# Altium PCB PCB_Control_2021-08-04.pcbdoc (part 2 of 2)
Units mil, origin at the board's own origin, x right, y up, seen from the top; angles counter-clockwise.
Board outline 4897.2 x 3916.1 mil, 2 copper layers (Top Layer, Bottom Layer); 50 components, 74 nets, 337 pads, 66 vias.
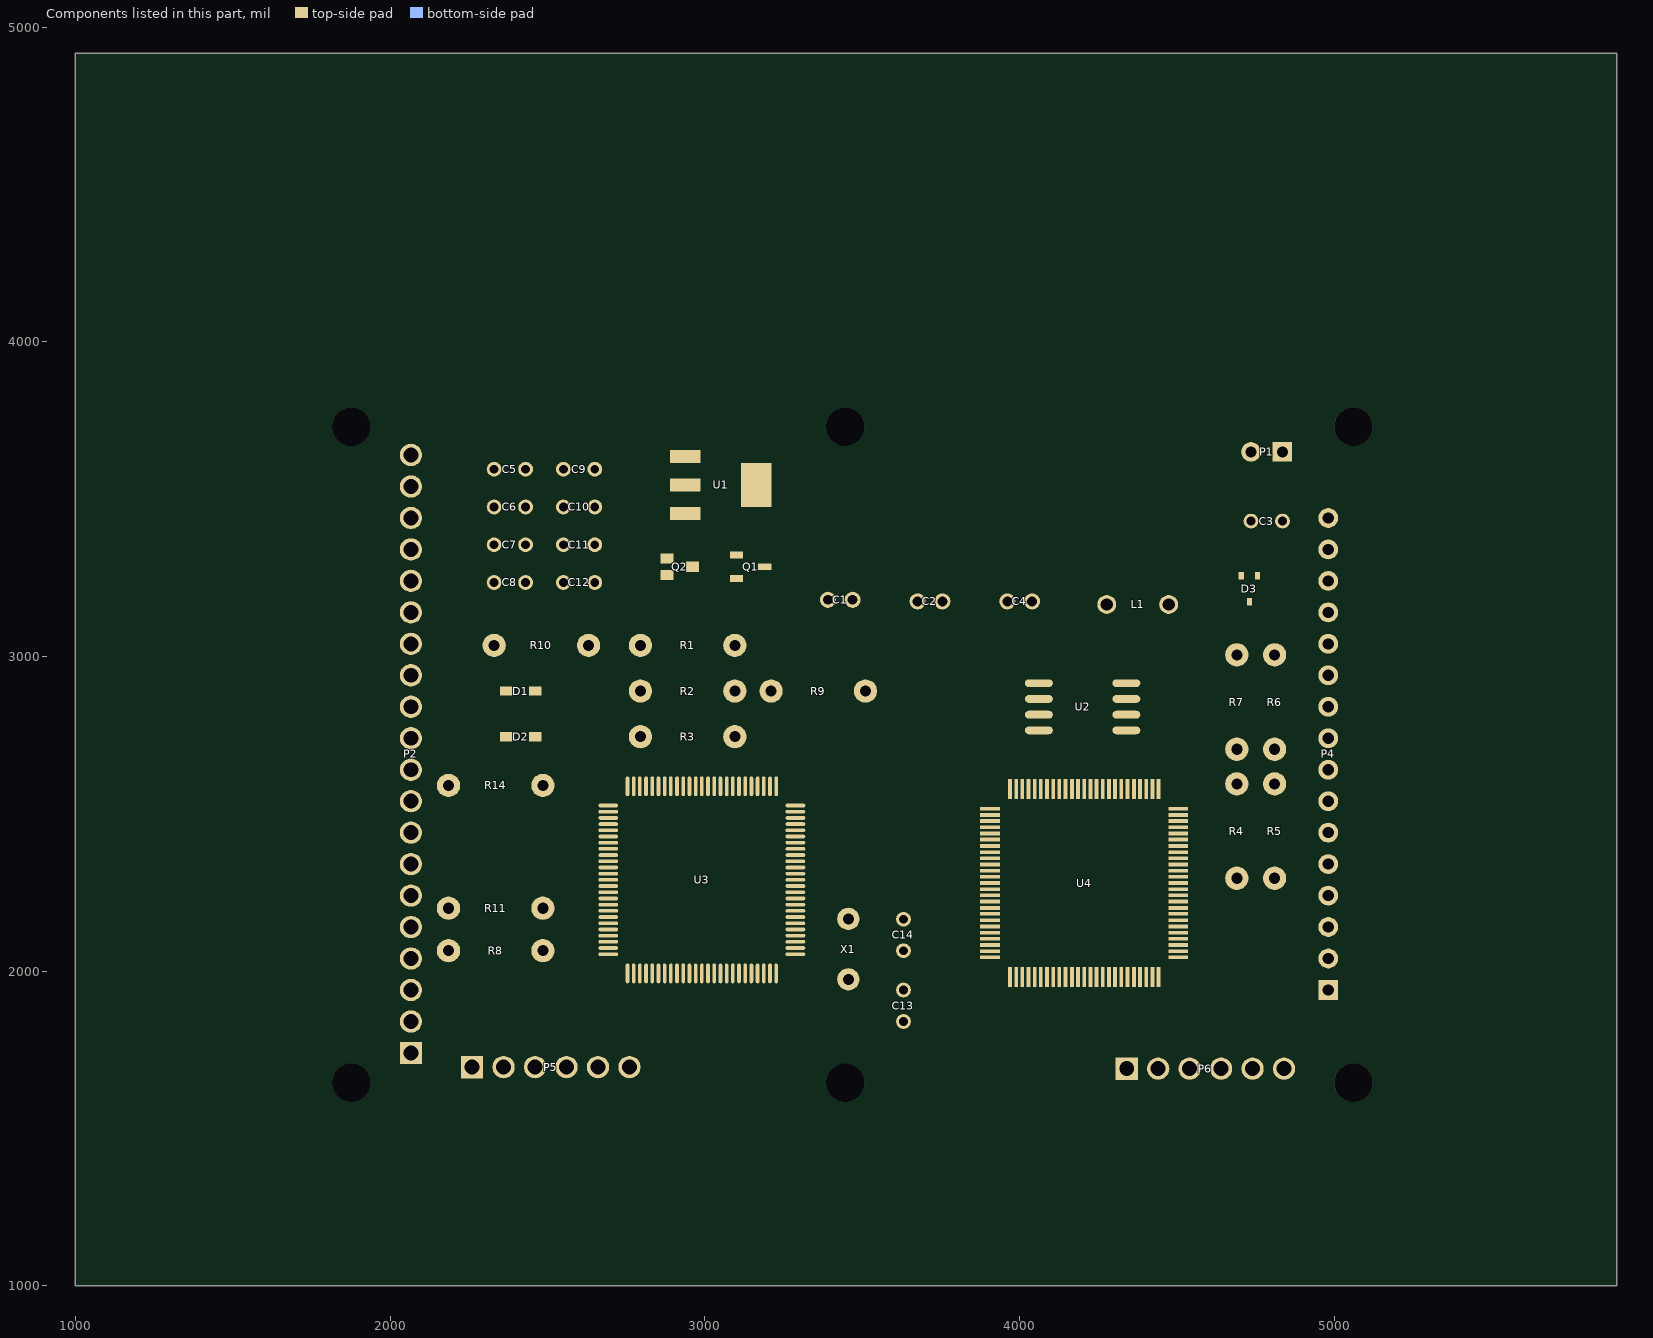
[diagram p2: the components of this part, seen from the top]

## Via types
v1: diameter 24.02, hole 12.01, Top Layer to Bottom Layer, 66 vias

## Nets (pads, with @x,y where several pads share a name; then routed paths per layer and width w, separated by ;. In a path a pad name is that pad's centre, name@x,y a point inside that pad or via, vN(x,y) a via of type N, cw(c..) or ccw(c..) an arc to the next point about the centre after c; other vN are vias at no path point) (continued)
pads on no net: D3.2 U1.4 U3.1 U3.2 U3.3 U3.4 U3.5 U3.7 U3.9 U3.14 U3.18 U3.24 U3.25 U3.26 U3.29 U3.30 U3.57 U3.65 U3.66 U3.67 U3.76 U3.77 U3.78 U3.79 U3.80 U3.81 U3.82 U3.85 U3.88 U3.89 U3.90 U3.91 U3.92 U3.93 U3.94 U3.95 U3.100 U4.12 U4.22 U4.23 U4.27 U4.34 U4.35 U4.36 U4.37 U4.38 U4.39 U4.41 U4.42 U4.43 U4.44 U4.47 U4.48 U4.49 U4.50 U4.53 U4.54 U4.55 U4.56 U4.58 U4.59 U4.60 U4.61 U4.62 U4.64 U4.65 U4.66 U4.67 U4.69 U4.70 U4.71 U4.72 U4.73 U4.77 U4.78 U4.79 U4.87 U4.88 U4.91 U4.97

## Polygon pours and split planes (outlines as drawn)
GND on Bottom Layer (solid): 1776.1,3830 5161.1,3830 5161.1,1545 1576.1,1500
GND on Top Layer (solid): 1776.1,3830 5161.1,3830 5161.1,1545 1776.1,1545 1651.1,1645

## Other copper
Top Layer:
  region net U2_7: 4496.41,3145.14 4451.41,3145.17 4468.9,3124.16 4478.9,3124.15
  region net U2_1: 4275.2,3194.94 4307.02,3163.12 4309.5,3190.34 4302.43,3197.42
  region net U2_1: 4247.14,3166.87 4278.97,3135.06 4251.75,3132.58 4244.67,3139.64
  region net Q1_3: 3444.33,3178.41 3471.49,3205.54 3448.79,3208.18 3441.71,3201.12
  region net U2_3: 4853.12,3414.46 4817.88,3414.46 4830.5,3398.01 4840.5,3398.01
  region net VCC: 2429.03,3378.45 2453.95,3353.53 2456.66,3374.09 2449.59,3381.16
  region net VCC: 2649.09,3451.54 2673.95,3476.53 2674.63,3458.04 2667.57,3450.96
  region net VCC: 2627.05,3476.47 2651.97,3451.55 2631.41,3448.84 2624.34,3455.91
  region net X1: 3615.56,1922.38 3615.56,1957.62 3599.11,1945 3599.11,1935
  region net X2: 3618.22,2145.34 3613.21,2180.23 3598.71,2165.45 3600.15,2155.45
  region net P1_2: 4715,3626.75 4715,3673.25 4693.3,3655 4693.3,3645
  region net U3_6: 4979.13,2108.57 5012.53,2141.97 5014.96,2113.21 5007.89,2106.14
  region net U4_93: 4949.67,2738.03 4983.07,2771.43 4954.32,2773.86 4947.24,2766.79
  region net U4_86: 4949.67,2941.97 4983.07,2908.57 4954.32,2906.14 4947.24,2913.22
  region net U3_53: 2458.28,1659.64 2495.86,1697.22 2498.15,1664.42 2491.08,1657.35
  region net VCC: 2325.14,1692.78 2362.72,1730.36 2329.92,1732.65 2322.85,1725.58
  region net U4_52: 4805.14,1687.78 4842.72,1725.36 4809.93,1727.65 4802.85,1720.58
  region net P1_2: 3058.57,3032.68 3097.82,3071.93 3072.23,3065.34 3065.16,3058.27
  region net Q1_1: 2758.57,3037.32 2797.82,2998.07 2763.42,2995.85 2756.35,3002.92
  region net Q1_1: 2823.25,3059.47 2767.75,3059.47 2790.5,3085.37 2800.5,3085.37
  region net U3_8: 2819.97,2862.25 2819.97,2917.75 2845.87,2895 2845.87,2885
  region net U3_8: 3058.57,2742.68 3097.82,2781.93 3063.42,2784.15 3056.35,2777.08
  region net R6_1: 4838.25,3029.47 4782.75,3029.47 4805.5,3055.37 4815.5,3055.37
  region net U2_5: 4773.57,2702.68 4812.82,2741.93 4778.42,2744.15 4771.35,2737.08
  region net U2_8: 4653.57,3007.32 4692.82,2968.07 4658.42,2965.85 4651.35,2972.92
  region net U3_17: 2183.18,2028.07 2222.43,2067.32 2224.65,2032.92 2217.58,2025.85
  region net U4_100: 3508.18,2853.07 3547.43,2892.32 3549.65,2857.92 3542.58,2850.85
  region net U3_49: 2606.03,3007.25 2606.03,3062.75 2580.13,3040 2580.13,3030
  region net U3_49: 2628.18,3071.93 2667.43,3032.68 2669.65,3067.08 2662.58,3074.15
  region net X1: 3420.74,1976.18 3458.3,1938.58 3425.5,1936.31 3418.43,1943.39
  region net X1: 3453.88,1938.58 3491.46,1976.16 3493.58,1943.54 3486.51,1936.46
  region net X2: 3482.47,2189.73 3476.29,2136.94 3503.43,2155.45 3504.6,2165.45
  region net U3_73: 2089.54,3413.43 2089.54,3466.57 2114.34,3445 2114.34,3435
  region net U3_70: 2030.74,3342.22 2068.32,3304.64 2035.53,3302.35 2028.45,3309.42
  region net U3_69: 2089.54,3213.43 2089.54,3266.57 2114.34,3245 2114.34,3235
  region net D1_1: 2089.54,3113.43 2089.54,3166.57 2114.34,3145 2114.34,3135
  region net U3_62: 2063.88,2704.64 2101.46,2742.22 2103.75,2709.42 2096.68,2702.35
  region net U3_61: 2030.74,2637.78 2068.32,2675.36 2035.53,2677.65 2028.45,2670.58
  region net U3_60: 2063.88,2575.36 2101.46,2537.78 2103.75,2570.58 2096.68,2577.65
  region net U3_58: 2099.92,2229.42 2072.37,2274.87 2104.33,2270 2110.39,2260
  region net U3_56: 2089.54,2113.43 2089.54,2166.57 2114.34,2145 2114.34,2135
  region net U3_50: 2089.54,1813.43 2089.54,1866.57 2114.34,1845 2114.34,1835
  region net Q1_3: 3948.39,2723.47 3945.77,2741.29 3954.66,2738.6 3956.13,2728.6
  region net VCC: 3985.7,2701.47 3985.7,2719.49 3991.5,2715.48 3991.5,2705.48
  region net VCC: 3204.24,2166.32 3204.24,2184.34 3212.65,2180.33 3212.65,2170.33
  region net VCC: 3020.23,1900.57 3020.19,1918.59 3028.6,1914.6 3028.63,1904.6
  region net VCC: 2947.33,1903.22 2934.61,1890.47 2931.49,1899.24 2938.55,1906.32
  region net VCC: 4283.75,2019.26 4275.71,2035.38 4269.71,2028.57 4274.71,2018.57
  region net VCC: 4297.97,2035.38 4289.92,2019.26 4298.97,2018.57 4303.96,2028.57
  region net X2: 3298.65,1944.66 3290.52,1960.73 3284.55,1953.9 3289.61,1943.9
  region net P1_2: 3554.55,3640.99 3554.55,3659.01 3562.96,3655 3562.96,3645
  region net U3_75: 2563.24,2621.23 2563.19,2603.22 2571.61,2607.2 2571.63,2617.2
  region net U3_74: 2431.35,2630.49 2431.34,2648.5 2439.75,2644.5 2439.75,2634.5
  region net U3_73: 2992.79,2822.21 2980.05,2809.48 2976.94,2818.26 2984.02,2825.33
  region net U3_73: 2800.74,2542.94 2783.09,2546.56 2788.6,2554.01 2798.6,2551.96
  region net U3_69: 2218.44,3241.64 2205.71,3228.9 2203.81,3236.46 2210.88,3243.54
  region net U3_69: 3133.06,2473.79 3120.38,2486.58 3118.88,2479.45 3125.92,2472.35
  region net U3_64: 2905.84,2715.42 2893.11,2728.15 2901.88,2731.26 2908.96,2724.19
  region net U3_64: 3001.1,2743.42 2988.36,2730.69 2985.25,2739.46 2992.32,2746.54
  region net U3_64: 2735.98,2474.15 2753.99,2474.15 2749.98,2465.74 2739.98,2465.74
  region net U3_64: 2773.17,2438.97 2760.43,2426.24 2757.32,2435.02 2764.4,2442.09
  region net U3_64: 2978.18,2527.86 2960.45,2531.02 2965.8,2538.61 2975.8,2536.82
  region net U3_63: 2887.51,2675.23 2887.45,2657.22 2895.87,2661.2 2895.9,2671.2
  region net U3_62: 2255.99,2492.19 2243.26,2479.46 2240.15,2488.23 2247.22,2495.31
  region net U3_62: 3009.58,2506.86 2991.57,2506.9 2995.6,2515.3 3005.6,2515.28
  region net U3_60: 2812.2,2470.87 2797.42,2460.58 2795.83,2469.72 2804.17,2475.53
  region net U3_60: 3045.12,2536.54 3032.41,2549.3 3041.19,2552.39 3048.25,2545.31
  region net U3_59: 2954.98,2729.92 2954.94,2711.91 2963.36,2715.9 2963.38,2725.9
  region net U3_58: 2373.41,2295.4 2360.67,2308.13 2357.56,2299.35 2364.64,2292.28
  region net U3_58: 3097.92,2628.85 3079.91,2628.88 3083.9,2620.47 3093.9,2620.45
  region net U3_56: 2365.44,2225.95 2352.7,2238.68 2349.59,2229.91 2356.67,2222.83
  region net U3_56: 3114.39,2521.15 3101.65,2533.87 3110.42,2536.99 3117.5,2529.93
  region net U3_52: 3167.42,2685.82 3154.68,2673.09 3163.46,2669.98 3170.53,2677.05
  region net U3_51: 3226.97,2479.42 3214.22,2492.14 3222.99,2495.26 3230.07,2488.2
  region net U3_50: 3205.1,2773.73 3192.36,2761 3201.13,2757.88 3208.21,2764.95
  region net U3_50: 2686.24,1835.11 2673.51,1822.38 2670.39,1831.15 2677.47,1838.23
  region net U3_27: 3440.05,2065.7 3440.04,2047.69 3431.64,2051.7 3431.65,2061.7
  region net U3_27: 4181,2633.55 4172.11,2617.89 4181.03,2616.57 4186.71,2626.57
  region net U4_99: 4409.79,2476.9 4409.78,2458.89 4401.38,2462.9 4401.39,2472.9
  region net U4_98: 4430.42,2482.06 4430.42,2500.08 4422.01,2496.07 4422.01,2486.07
  region net U4_94: 4097.52,2630.11 4079.66,2632.44 4082.5,2623.59 4092.5,2622.29
  region net U4_92: 4643.11,2755.32 4630.37,2742.59 4627.26,2751.37 4634.33,2758.44
  region net U4_86: 4510.21,2726.39 4510.21,2744.41 4501.8,2740.4 4501.8,2730.4
  region net U4_86: 4526.37,2805.65 4526.37,2823.67 4534.78,2819.66 4534.78,2809.66
  region net U4_85: 4569.62,2703.3 4569.61,2721.31 4561.21,2717.3 4561.22,2707.3
  region net U4_84: 4551.29,2700.63 4543.39,2684.44 4537.35,2691.22 4542.23,2701.22
  region net U4_81: 4895.03,2739.74 4913.05,2739.74 4909.04,2731.33 4899.04,2731.33
  region net U4_80: 4496.2,2645.06 4483.47,2657.79 4480.36,2649.02 4487.43,2641.95
  region net U3_53: 2728.16,1580.99 2728.16,1599.01 2719.75,1595 2719.75,1585
  region net U3_53: 3201.1,2542.61 3188.35,2529.89 3185.25,2538.67 3192.33,2545.73
  region net U4_2: 4341.81,2190.32 4329.08,2177.59 4325.97,2186.36 4333.04,2193.44
  region net U4_74: 4771.07,2455.81 4758.36,2443.05 4755.23,2451.82 4762.29,2458.9
  region net U4_24: 4037.65,2056.52 4032.92,2073.9 4025.82,2068 4028.54,2058
  region net U3_8: 2901.1,1950.06 2883.09,1950.08 2887.1,1958.48 2897.1,1958.47
  region net U3_87: 3172.76,2098.91 3160.06,2086.14 3156.92,2094.91 3163.98,2102
  region net U3_87: 3717.23,1844.73 3717.19,1826.71 3725.61,1830.7 3725.63,1840.7
  region net U3_34: 3559.58,2174.51 3559.54,2192.52 3551.14,2188.5 3551.16,2178.5
  region net U3_34: 3810.21,2152.45 3809,2170.42 3817.66,2167 3818.33,2157
  region net U3_98: 2447.25,2317.23 2437.33,2302.2 2446.49,2300.82 2452.12,2309.34
  region net U3_99: 2654.84,2083.24 2653.18,2065.3 2661.92,2068.5 2662.84,2078.5
  region net U3_99: 2688.16,1930.99 2688.16,1949.01 2679.75,1945 2679.75,1935
  region net U3_99: 2629.04,1930.99 2629.04,1949.01 2637.45,1945 2637.45,1935
  region net Q1_1: 2481.35,2902.5 2481.35,2877.5 2496.35,2885 2496.35,2895
  region net D1_1: 2381.8,2875.24 2356.8,2875.24 2364.3,2860.24 2374.3,2860.24
  region net D1_1: 2356.8,2904.76 2381.8,2904.76 2374.3,2915.8 2364.3,2915.8
  region net U3_68: 2474.2,2730.24 2449.2,2730.24 2456.7,2719.2 2466.7,2719.2
  region net D1_1: 2356.8,2759.76 2381.8,2759.76 2374.3,2774.76 2364.3,2774.76
  region net R6_1: 4738.75,3186.25 4738.75,3161.75 4749.8,3169 4749.8,3179
  region net U2_1: 4748.25,3243.75 4748.25,3268.25 4737.2,3261 4737.2,3251
  region net Q1_1: 3079.76,3332.87 3079.76,3311.93 3068.7,3317.4 3068.7,3327.4
  region net P1_2: 3079.76,3258.07 3079.76,3237.13 3068.7,3242.6 3068.7,3252.6
  region net Q1_3: 3211.25,3274.53 3211.25,3295.47 3226.25,3290 3226.25,3280
  region net Q1_3: 3169.13,3295.47 3169.13,3274.53 3158.1,3280 3158.1,3290
  region net Q1_1: 2973,3268.75 2948,3268.75 2955.5,3257.7 2965.5,3257.7
  region net U3_49: 2859.75,3298.5 2859.75,3323.5 2848.7,3316 2848.7,3306
  region net Q1_3: 2986.53,3623 2986.53,3648 2997.6,3640.5 2997.6,3630.5
  region net VCC: 2889.47,3467 2889.47,3442 2874.47,3449.5 2874.47,3459.5
  region net U4_80: 4357.5,2610.5 4369.5,2610.5 4368.5,2621.6 4358.5,2621.6
  region net U4_81: 4349.5,2547.5 4337.5,2547.5 4338.5,2536.4 4348.5,2536.4
  region net VCC: 4309.5,2547.5 4297.5,2547.5 4298.5,2536.4 4308.5,2536.4
  region net U4_84: 4278.5,2610.5 4290.5,2610.5 4289.5,2621.6 4279.5,2621.6
  region net U4_85: 4258.5,2610.5 4270.5,2610.5 4269.5,2625.1 4259.5,2625.1
  region net U4_86: 4238.5,2610.5 4250.5,2610.5 4249.5,2625.5 4239.5,2625.5
  region net U3_27: 4179.5,2610.5 4191.5,2610.5 4190.5,2621.6 4180.5,2621.6
  region net VCC: 4172.5,2547.5 4160.5,2547.5 4161.5,2540.5 4171.5,2540.5
  region net U4_92: 4120.5,2610.5 4132.5,2610.5 4131.5,2617.8 4121.5,2617.8
  region net U4_93: 4101.5,2610.5 4113.5,2610.5 4112.5,2621.6 4102.5,2621.6
  region net U4_94: 4081.5,2610.5 4093.5,2610.5 4092.5,2625.5 4082.5,2625.5
  region net VCC: 4061.5,2610.5 4073.5,2610.5 4072.5,2621.6 4062.5,2621.6
  region net VCC: 4073.5,2547.5 4061.5,2547.5 4062.5,2536.4 4072.5,2536.4
  region net U4_98: 4014.5,2547.5 4002.5,2547.5 4003.5,2536.4 4013.5,2536.4
  region net U4_99: 3995.5,2547.5 3983.5,2547.5 3984.5,2532.5 3994.5,2532.5
  region net U4_100: 3963.5,2610.5 3975.5,2610.5 3974.5,2621.6 3964.5,2621.6
  region net U4_52: 4536,2069 4536,2057 4547.1,2058 4547.1,2068
  region net VCC: 4473,2274 4473,2286 4461.9,2285 4461.9,2275
  region net U4_74: 4536,2502 4536,2490 4551,2491 4551,2501
  region net VCC: 4473,2510 4473,2522 4461.9,2521 4461.9,2511
  region net VCC: 4337.5,2012.5 4349.5,2012.5 4348.5,2023.6 4338.5,2023.6
  region net VCC: 4238.5,2012.5 4250.5,2012.5 4249.5,2023.6 4239.5,2023.6
  region net VCC: 4101.5,2012.5 4113.5,2012.5 4112.5,2023.6 4102.5,2023.6
  region net U3_87: 4073.5,1949.5 4061.5,1949.5 4062.5,1937.2 4072.5,1937.2
  region net U3_86: 4042.5,2012.5 4054.5,2012.5 4053.5,2023.6 4043.5,2023.6
  region net U3_20: 4034.5,1949.5 4022.5,1949.5 4023.5,1934.5 4033.5,1934.5
  region net U3_21: 4014.5,1949.5 4002.5,1949.5 4003.5,1938.4 4013.5,1938.4
  region net VCC: 3875,2038 3875,2050 3863.9,2049 3863.9,2039
  region net VCC: 3938,2050 3938,2038 3953,2039 3953,2049
  region net U4_24: 3938,2069 3938,2057 3953,2058 3953,2068
  region net U3_32: 3875,2116 3875,2128 3860,2127 3860,2117
  region net U3_33: 3875,2136 3875,2148 3860,2147 3860,2137
  region net U3_34: 3875,2156 3875,2168 3860,2167 3860,2157
  region net U3_35: 3875,2195 3875,2207 3860,2206 3860,2196
  region net U3_36: 3875,2215 3875,2227 3863.9,2226 3863.9,2216
  region net U3_37: 3875,2235 3875,2247 3860,2246 3860,2236
  region net U3_38: 3875,2254 3875,2266 3860,2265 3860,2255
  region net VCC: 3938,2286 3938,2274 3953,2275 3953,2285
  region net U3_39: 3875,2313 3875,2325 3860,2324 3860,2314
  region net U3_40: 3875,2333 3875,2345 3860,2344 3860,2334
  region net U3_43: 3875,2353 3875,2365 3863.9,2364 3863.9,2354
  region net U3_44: 3875,2372 3875,2384 3860,2383 3860,2373
  region net U3_45: 3875,2412 3875,2424 3860,2423 3860,2413
  region net U3_46: 3875,2431 3875,2443 3863.9,2442 3863.9,2432
  region net U3_47: 3875,2451 3875,2463 3860,2462 3860,2452
  region net U3_48: 3875,2471 3875,2483 3860,2482 3860,2472
  region net U4_2: 3938,2502 3938,2490 3949.1,2491 3949.1,2501
  region net VCC: 2101.53,1752.5 2101.53,1727.5 2112.6,1735 2112.6,1745
  region net U2_1: 4049,2927.4 4074,2927.4 4066.5,2942.4 4056.5,2942.4
  region net U2_3: 4081.99,2827.4 4105.33,2818.44 4116.53,2842.4 4102.4,2842.4
  region net U2_8: 4318.8,2902.6 4295.59,2911.89 4284.23,2887.6 4298.37,2887.6
  region net U2_7: 4359.2,2877.4 4382.92,2869.51 4393.77,2892.4 4379.63,2892.4
  region net Q1_3: 4307.59,2802.6 4307.59,2827.4 4292.59,2820 4292.59,2810
  region net U3_99: 2667.68,2079.36 2667.65,2067.55 2652.65,2068.5 2652.68,2078.5
  region net U3_98: 2667.67,2087.24 2667.67,2099.05 2661.24,2098.15 2661.24,2088.15
  region net VCC: 2667.69,2126.61 2667.65,2138.43 2661.38,2137.5 2661.41,2127.5
  region net U3_87: 2718.85,2303.78 2718.85,2315.6 2733.85,2314.7 2733.85,2304.7
  region net U3_86: 2718.86,2323.46 2718.84,2335.28 2733.84,2334.4 2733.86,2324.4
  region net VCC: 2718.86,2374.65 2718.83,2362.83 2733.84,2363.7 2733.86,2373.7
  region net VCC: 2667.69,2362.83 2667.65,2374.65 2655.19,2373.7 2655.22,2363.7
  region net U3_75: 2748.37,2580.62 2748.37,2605.62 2733.37,2615.2 2733.37,2601.05
  region net U3_74: 2779.87,2612.81 2768.06,2612.85 2769,2624.52 2779,2624.48
  region net U3_73: 2799.55,2561.63 2787.74,2561.67 2788.6,2546.67 2798.6,2546.63
  region net VCC: 2838.93,2561.64 2827.11,2561.66 2828,2546.66 2838,2546.64
  region net U3_70: 2858.61,2612.83 2846.8,2612.83 2847.7,2619.6 2857.7,2619.6
  region net U3_69: 2878.3,2561.66 2866.48,2561.64 2867.4,2551.49 2877.4,2551.5
  region net U3_68: 2897.98,2612.8 2886.17,2612.86 2887.1,2619.32 2897.1,2619.28
  region net U3_64: 2976.73,2561.64 2964.92,2561.66 2965.8,2546.66 2975.8,2546.64
  region net U3_63: 2996.41,2612.83 2984.59,2612.83 2985.5,2619.5 2995.5,2619.5
  region net U3_62: 3016.1,2561.66 3004.29,2561.64 3005.2,2552.99 3015.2,2553.01
  region net U3_61: 3035.78,2612.81 3023.96,2612.85 3024.9,2620.52 3034.9,2620.48
  region net U3_60: 3055.46,2561.68 3043.65,2561.62 3044.6,2553.67 3054.6,2553.73
  region net U3_59: 3075.15,2612.86 3063.33,2612.8 3064.2,2620.98 3074.2,2621.02
  region net U3_58: 3094.83,2612.84 3083.02,2612.82 3083.9,2627.82 3093.9,2627.84
  region net U3_56: 3134.2,2561.65 3122.39,2561.65 3123.3,2547.8 3133.3,2547.8
  region net VCC: 3173.57,2561.66 3161.76,2561.64 3162.7,2546.64 3172.7,2546.66
  region net U3_53: 3193.26,2561.67 3181.45,2561.63 3182.4,2546.63 3192.4,2546.67
  region net U3_52: 3212.94,2612.84 3201.13,2612.81 3202,2627.82 3212,2627.84
  region net U3_51: 3232.63,2561.64 3220.82,2561.66 3221.7,2546.66 3231.7,2546.64
  region net U3_50: 3275.2,2532.13 3300.2,2532.13 3292.7,2547.13 3282.7,2547.13
  region net U3_49: 3262.18,2500.64 3262.12,2512.45 3253.67,2511.5 3253.72,2501.5
  region net U3_48: 3313.35,2480.95 3313.31,2492.76 3328.32,2491.9 3328.35,2481.9
  region net U3_47: 3313.34,2461.26 3313.32,2473.08 3328.32,2472.2 3328.34,2462.2
  region net U3_46: 3313.34,2441.57 3313.32,2453.39 3328.33,2452.5 3328.34,2442.5
  region net U3_45: 3313.33,2421.89 3313.33,2433.71 3328.33,2432.8 3328.33,2422.8
  region net U3_44: 3313.34,2414.02 3313.33,2402.2 3328.33,2403.1 3328.34,2413.1
  region net U3_43: 3313.34,2394.34 3313.32,2382.52 3328.32,2383.4 3328.34,2393.4
  region net VCC: 3262.17,2362.83 3262.14,2374.65 3247.14,2373.7 3247.16,2363.7
  region net U3_40: 3313.34,2323.46 3313.32,2335.28 3328.32,2334.4 3328.34,2324.4
  region net U3_39: 3313.34,2303.78 3313.33,2315.6 3328.33,2314.7 3328.34,2304.7
  region net U3_38: 3313.33,2284.09 3313.33,2295.91 3328.33,2295 3328.33,2285
  region net U3_37: 3313.34,2276.23 3313.32,2264.41 3328.33,2265.3 3328.34,2275.3
  region net U3_36: 3313.34,2256.54 3313.32,2244.72 3328.32,2245.6 3328.34,2255.6
  region net U3_35: 3313.35,2236.85 3313.32,2225.03 3328.32,2225.9 3328.34,2235.9
  region net U3_33: 3313.34,2185.66 3313.32,2197.48 3328.32,2196.6 3328.34,2186.6
  region net U3_32: 3313.34,2165.98 3313.33,2177.8 3328.33,2176.9 3328.34,2166.9
  region net VCC: 3262.18,2087.24 3262.12,2099.05 3251.68,2098.1 3251.72,2088.1
  region net VCC: 3313.35,2099.05 3313.31,2087.24 3328.32,2088.1 3328.35,2098.1
  region net U3_27: 3313.35,2067.55 3313.32,2079.36 3328.32,2078.5 3328.35,2068.5
  region net X2: 3193.26,1967.21 3181.45,1967.12 3182.4,1960.46 3192.4,1960.54
  region net X1: 3173.57,1967.18 3161.76,1967.15 3162.7,1952.16 3172.7,1952.18
  region net U3_21: 3153.89,1967.18 3142.07,1967.16 3143,1952.16 3153,1952.17
  region net U3_20: 3134.2,1967.17 3122.39,1967.17 3123.3,1952.17 3133.3,1952.17
  region net VCC: 3114.52,1967.16 3102.7,1967.17 3103.6,1958.51 3113.6,1958.5
  region net U3_17: 3075.15,2018.38 3063.33,2018.32 3064.2,2026.18 3074.2,2026.23
  region net VCC: 2984.59,1980.3 2984.59,2005.3 2970.8,1997.8 2970.8,1987.8
  region net VCC: 2976.73,2005.3 2976.73,1980.3 2990.5,1987.8 2990.5,1997.8
  region net VCC: 2937.35,1967.15 2925.54,1967.19 2926.4,1952.18 2936.4,1952.15
  region net U3_8: 2897.98,1967.18 2886.17,1967.16 2887.1,1952.16 2897.1,1952.18
  region net U3_6: 2858.61,1967.17 2846.8,1967.17 2847.7,1957.7 2857.7,1957.7
Bottom Layer:
  region net U2_7: 4496.43,3145.16 4451.43,3145.15 4468.93,3124.16 4478.93,3124.16
  region net Q1_3: 3468.27,3154.46 3495.41,3181.6 3498.04,3158.9 3490.97,3151.83
  region net Q1_3: 3466.36,3154.65 3445.16,3186.65 3438.01,3165.01 3443.64,3156.5
  region net VCC: 3674.53,3149.46 3701.67,3176.6 3704.3,3153.9 3697.23,3146.83
  region net VCC: 3695.32,3191.93 3656.94,3191.93 3671.13,3209.84 3681.13,3209.84
  region net R6_1: 3985.77,3168.07 3951.18,3151.42 3971.47,3141.31 3981.02,3145.91
  region net VCC: 2448.12,3579.46 2412.88,3579.46 2425.5,3563.01 2435.5,3563.01
  region net VCC: 2448.12,3490.54 2412.88,3490.54 2425.5,3506.99 2435.5,3506.99
  region net VCC: 2448.12,3459.46 2412.88,3459.46 2425.5,3443.01 2435.5,3443.01
  region net VCC: 2448.12,3339.46 2412.88,3339.46 2425.5,3323.01 2435.5,3323.01
  region net VCC: 2448.12,3370.54 2412.88,3370.54 2425.5,3386.99 2435.5,3386.99
  region net VCC: 2448.12,3250.54 2412.88,3250.54 2425.5,3266.99 2435.5,3266.99
  region net VCC: 2666.04,3577.38 2666.04,3612.62 2682.49,3600 2682.49,3590
  region net VCC: 2668.12,3579.46 2632.88,3579.46 2645.5,3563.01 2655.5,3563.01
  region net VCC: 2668.12,3490.54 2632.88,3490.54 2645.5,3506.99 2655.5,3506.99
  region net VCC: 2668.12,3459.46 2632.88,3459.46 2645.5,3443.01 2655.5,3443.01
  region net VCC: 2668.12,3370.54 2632.88,3370.54 2645.5,3386.99 2655.5,3386.99
  region net VCC: 2668.12,3339.46 2632.88,3339.46 2645.5,3323.01 2655.5,3323.01
  region net VCC: 2668.12,3250.54 2632.88,3250.54 2645.5,3266.99 2655.5,3266.99
  region net U3_27: 4949.67,2238.03 4983.07,2271.43 4954.32,2273.86 4947.24,2266.79
  region net U4_99: 4949.67,2338.03 4983.07,2371.43 4954.32,2373.86 4947.24,2366.79
  region net U4_98: 4949.67,2438.03 4983.07,2471.43 4954.32,2473.86 4947.24,2466.79
  region net U4_94: 4949.67,2641.97 4983.07,2608.57 4954.32,2606.14 4947.24,2613.22
  region net U4_92: 4949.67,2838.03 4983.07,2871.43 4954.32,2873.86 4947.24,2866.79
  region net U4_85: 4949.67,3038.03 4983.07,3071.43 4954.47,3073.71 4947.39,3066.64
  region net U4_84: 4979.13,3171.43 5012.53,3138.03 5014.96,3166.79 5007.89,3173.86
  region net U4_81: 4949.67,3241.97 4983.07,3208.57 4954.32,3206.14 4947.24,3213.21
  region net U4_80: 4960.27,3316.38 4960.27,3363.62 4938.22,3345 4938.22,3335
  region net P5_5: 2687.07,1718.44 2633.93,1718.44 2655.5,1743.24 2665.5,1743.24
  region net U3_99: 2587.07,1718.44 2533.93,1718.44 2555.5,1743.24 2565.5,1743.24
  region net VCC: 2387.07,1718.44 2333.93,1718.44 2355.5,1743.24 2365.5,1743.24
  region net U4_2: 4705.14,1687.78 4742.72,1725.36 4709.93,1727.65 4702.85,1720.58
  region net U4_74: 4638.28,1654.64 4675.86,1692.22 4678.15,1659.42 4671.08,1652.35
  region net U4_24: 4505.14,1692.22 4542.72,1654.64 4509.93,1652.35 4502.85,1659.42
  region net P1_2: 3093.18,3071.93 3132.43,3032.68 3134.65,3067.08 3127.58,3074.15
  region net Q1_3: 3093.18,2926.93 3132.43,2887.68 3134.65,2922.08 3127.58,2929.15
  region net U3_8: 3093.18,2708.07 3132.43,2747.32 3129.03,2718.55 3121.95,2711.47
  region net U2_7: 4666.03,2567.25 4666.03,2622.75 4640.13,2600 4640.13,2590
  region net U2_7: 4718.25,2619.47 4662.75,2619.47 4685.5,2645.37 4695.5,2645.37
  region net Q1_3: 4666.03,2267.25 4666.03,2322.75 4640.13,2300 4640.13,2290
  region net U2_5: 4838.25,2619.47 4782.75,2619.47 4805.5,2645.37 4815.5,2645.37
  region net R6_1: 4838.25,2980.53 4782.75,2980.53 4805.5,2954.63 4815.5,2954.63
  region net U2_5: 4838.25,2680.53 4782.75,2680.53 4805.5,2654.63 4815.5,2654.63
  region net U2_7: 4718.25,2680.53 4662.75,2680.53 4685.5,2654.63 4695.5,2654.63
  region net VCC: 2448.57,2067.32 2487.82,2028.07 2453.42,2025.85 2446.35,2032.92
  region net U3_17: 2213.25,2089.47 2157.75,2089.47 2180.5,2115.37 2190.5,2115.37
  region net U3_53: 3186.41,2861.92 3241.37,2869.61 3222.48,2840.81 3212.48,2839.41
  region net U3_17: 2213.25,2175.53 2157.75,2175.53 2180.5,2149.63 2190.5,2149.63
  region net P5_5: 2483.18,2163.07 2522.43,2202.32 2524.65,2167.92 2517.58,2160.85
  region net U3_64: 2512.97,2614.79 2506.66,2559.65 2534.97,2579.27 2536.12,2589.27
  region net U3_64: 2461.03,2562.25 2461.03,2617.75 2435.13,2595 2435.13,2585
  region net X2: 3420.74,2168.28 3458.32,2130.7 3425.53,2128.41 3418.45,2135.48
  region net U3_75: 2063.88,3604.64 2101.46,3642.22 2103.75,3609.42 2096.68,3602.35
  region net U3_74: 2063.88,3504.64 2101.46,3542.22 2103.75,3509.42 2096.68,3502.35
  region net U3_64: 2063.88,2904.64 2101.46,2942.22 2103.75,2909.42 2096.68,2902.35
  region net U3_63: 2063.88,2804.64 2101.46,2842.22 2103.75,2809.43 2096.68,2802.35
  region net U3_59: 2030.74,2337.78 2068.32,2375.36 2035.53,2377.65 2028.45,2370.58
  region net U3_52: 2063.88,2075.36 2101.46,2037.78 2103.75,2070.57 2096.68,2077.65
  region net U3_51: 2063.88,1904.64 2101.46,1942.22 2103.75,1909.42 2096.68,1902.35
  region net Q1_3: 3934.36,2720.24 3928.94,2737.42 3922.05,2731.3 3925.21,2721.3
  region net Q1_3: 3948.89,2724.1 3930.95,2722.52 3934.17,2714.36 3947.16,2715.51
  region net VCC: 3968.75,2718.42 3986.77,2718.42 3982.76,2726.83 3972.76,2726.83
  region net VCC: 3184.92,2171.5 3201.52,2164.52 3194.94,2158.17 3184.98,2162.35
  region net VCC: 3004.32,1900.55 3004.32,1918.57 2995.92,1914.56 2995.92,1904.56
  region net VCC: 3021.28,1917.5 3003.26,1917.51 3007.27,1925.91 3017.27,1925.91
  region net VCC: 2956.07,1883.86 2938.09,1882.75 2942.6,1874.6 2952.6,1875.22
  region net VCC: 2958.46,1889.41 2946.91,1903.23 2955.91,1905.57 2962.35,1897.86
  region net VCC: 4298.82,2031.62 4286.08,2018.88 4294.86,2015.77 4301.93,2022.84
  region net X2: 3292.67,1964.22 3310.68,1964.22 3306.67,1972.63 3296.67,1972.63
  region net P1_2: 3555.62,3642.06 3537.6,3642.05 3541.61,3633.65 3551.61,3633.65
  region net U3_75: 2556.02,2624.23 2543.29,2611.49 2540.18,2620.27 2547.25,2627.34
  region net U3_74: 2424.15,2651.47 2411.42,2638.74 2408.3,2647.51 2415.38,2654.59
  region net U3_73: 2992.79,2798.25 2980.05,2810.98 2976.94,2802.2 2984.02,2795.13
  region net U3_73: 2798.26,2527.96 2798.26,2545.98 2805.67,2541.97 2805.67,2531.97
  region net U3_69: 2208.68,3221.71 2226.7,3221.71 2222.69,3213.3 2212.69,3213.3
  region net U3_69: 3126.17,2496.07 3143.34,2490.63 3142.67,2499.66 3131.92,2503.06
  region net U3_64: 2894.61,2704.18 2881.87,2716.92 2878.76,2708.15 2885.84,2701.07
  region net U3_64: 2991.34,2723.5 3009.35,2723.5 3005.35,2715.09 2995.35,2715.09
  region net U3_64: 2752.93,2473.08 2752.93,2491.1 2761.33,2487.09 2761.33,2477.09
  region net U3_64: 2780.36,2417.98 2780.36,2436 2788.77,2431.99 2788.77,2421.99
  region net U3_64: 2968.67,2509.64 2955.94,2522.37 2952.83,2513.6 2959.9,2506.53
  region net U3_63: 2880.29,2654.27 2867.55,2667 2864.44,2658.22 2871.51,2651.15
  region net U3_62: 2267.23,2480.96 2254.49,2468.23 2263.27,2465.11 2270.34,2472.19
  region net U3_62: 3001.31,2486.96 2988.57,2499.69 2985.46,2490.92 2992.53,2483.84
  region net U3_60: 2821.33,2458.45 2808.6,2471.19 2817.38,2474.3 2824.44,2467.23
  region net U3_60: 3030.13,2548.93 3021.99,2532.87 3016.03,2539.7 3021.09,2549.7
  region net U3_59: 2956.03,2712.99 2938.01,2712.98 2942.02,2704.58 2952.02,2704.58
  region net U3_58: 2384.64,2308.13 2371.91,2295.4 2380.68,2292.29 2387.75,2299.36
  region net U3_58: 3097.94,2628.87 3079.92,2628.86 3083.93,2620.46 3093.93,2620.46
  region net U3_56: 2376.67,2237.18 2363.94,2249.91 2372.71,2253.02 2379.79,2245.95
  region net U3_56: 3103.16,2509.91 3090.42,2522.64 3087.31,2513.87 3094.38,2506.79
  region net U3_52: 3143.97,2688.66 3160.42,2695.99 3153.77,2702.23 3143.77,2697.77
  region net U3_51: 3215.73,2468.18 3203,2480.91 3199.89,2472.14 3206.96,2465.07
  region net U3_50: 3202.81,2765.9 3184.87,2764.25 3189.61,2756.24 3199.61,2757.16
  region net U3_50: 2693.43,1814.12 2693.43,1832.14 2701.84,1828.13 2701.84,1818.13
  region net U3_27: 3455.93,2047.68 3455.93,2065.7 3464.34,2061.69 3464.34,2051.69
  region net U3_27: 4170.4,2641.63 4157.67,2628.89 4154.56,2637.67 4161.63,2644.74
  region net U4_99: 4425.67,2458.88 4425.67,2476.9 4434.08,2472.89 4434.08,2462.89
  region net U4_98: 4446.3,2482.06 4446.3,2500.08 4454.71,2496.07 4454.71,2486.07
  region net U4_94: 4101.61,2639.9 4088.87,2627.17 4097.65,2624.06 4104.72,2631.13
  region net U4_92: 4654.34,2742.59 4641.6,2755.32 4650.38,2758.44 4657.45,2751.36
  region net U4_86: 4527.29,2743.19 4509.28,2743.5 4513.43,2751.83 4523.43,2751.66
  region net U4_86: 4509.42,2806.72 4527.44,2806.72 4523.43,2798.31 4513.43,2798.31
  region net U4_85: 4589.55,2711.56 4576.81,2724.29 4585.58,2727.41 4592.66,2720.33
  region net U4_84: 4545.47,2696.99 4563.49,2696.99 4559.48,2705.4 4549.48,2705.4
  region net U4_81: 4916.02,2746.93 4903.29,2759.67 4912.06,2762.78 4919.14,2755.7
  region net U4_80: 4496.2,2669.03 4483.47,2656.29 4480.36,2665.07 4487.43,2672.14
  region net U3_53: 2744.04,1580.99 2744.04,1599.01 2752.45,1595 2752.45,1585
  region net U3_53: 3212.03,2527.9 3201.59,2542.57 3210.72,2544.24 3216.6,2535.98
  region net U3_53: 3212.23,2532.33 3200.54,2518.62 3209.53,2516.21 3216.04,2523.84
  region net U4_2: 4353.05,2179.09 4340.31,2166.36 4349.09,2163.24 4356.16,2170.32
  region net U4_74: 4778.28,2434.81 4778.28,2452.83 4786.69,2448.82 4786.69,2438.82
  region net U4_24: 4033.95,2059.35 4051.96,2059.35 4047.95,2050.94 4037.95,2050.94
  region net U3_8: 2883.08,1950.07 2901.09,1950.07 2897.08,1958.48 2887.08,1958.48
  region net U3_87: 3181.05,2078.98 3163.03,2078.97 3167.04,2070.57 3177.04,2070.57
  region net U3_87: 3710.02,1823.76 3697.29,1836.49 3694.17,1827.71 3701.25,1820.64
  region net U3_34: 3579.49,2182.78 3566.75,2195.51 3575.53,2198.63 3582.6,2191.56
  region net U3_34: 3802.43,2172.89 3789.7,2160.15 3786.59,2168.93 3793.66,2176
  region net U3_98: 2436.41,2326.07 2423.68,2313.34 2420.57,2322.11 2427.64,2329.18
  region net U3_99: 2658.09,2075.75 2645.35,2063.02 2654.12,2059.9 2661.2,2066.98
  region net U3_99: 2687.09,1947.94 2705.11,1947.94 2701.1,1956.35 2691.1,1956.35
  region net U3_99: 2621.85,1928.02 2609.12,1940.75 2606.01,1931.98 2613.08,1924.9
  region net R6_1: 4968.6,1971.5 4993.6,1971.5 4986.1,1982.6 4976.1,1982.6
  region net U3_98: 2248,1730.43 2273,1730.43 2265.5,1745.43 2255.5,1745.43
  region net VCC: 4328,1725.43 4353,1725.43 4345.5,1740.43 4335.5,1740.43
  region net VCC: 2101.53,1722.25 2083.86,1704.57 2099.76,1699.26 2106.84,1706.34

## Silkscreen, mask and mechanical layers (free items; w line width, h text height)
Top Overlay:
  rectangle: 3966.1,3482.5 4556.1,3487.5
  rectangle: 3966.1,3575 4556.1,3580
  lines w10: 3681.1,3688.75 4551.1,3688.75 4551.1,3791.25 3681.1,3791.25 3681.1,3688.75
  text "-" at 4830.81,3750 h39.37 r270
  text "+" at 4764.42,3736.08 h39.37 r45
  text "20" at 2105.78,3705 h39.37 r90
  text "/// Control Board ///" at 3716.1,3696.25 h45
  text "Line Scan Camera" at 3971.1,3582.5 h45
  text "16" at 5020.78,3510 h39.37 r90
  text "DivertingPan" at 4160.71,3487.5 h45 r359
  text "2021/07/14" at 4161.1,3392.5 h45
  text "1" at 4986.41,1855 h39.37 r270
  text "TXD" at 2300.18,1760 h39.37 r90
  text "3V3" at 2400.18,1760 h39.37 r90
  text "RXD" at 2600.18,1760 h39.37 r90
  text "RST" at 2700.18,1760 h39.37 r90
  text "GND" at 2800.18,1760 h39.37 r90
  text "VCC" at 4380.19,1755 h39.37 r90
  text "GND" at 4480.19,1755 h39.37 r90
  text "TCK" at 4580.19,1755 h39.37 r90
  text "TDO" at 4680.19,1755 h39.37 r90
  text "TDI" at 4780.19,1755 h39.37 r90
  text "TMS" at 4880.19,1755 h39.37 r90
  text "1" at 2066.41,1650 h39.37 r270